# EAGLE board I-Rob_PCB (EAGLE 9.7.0)
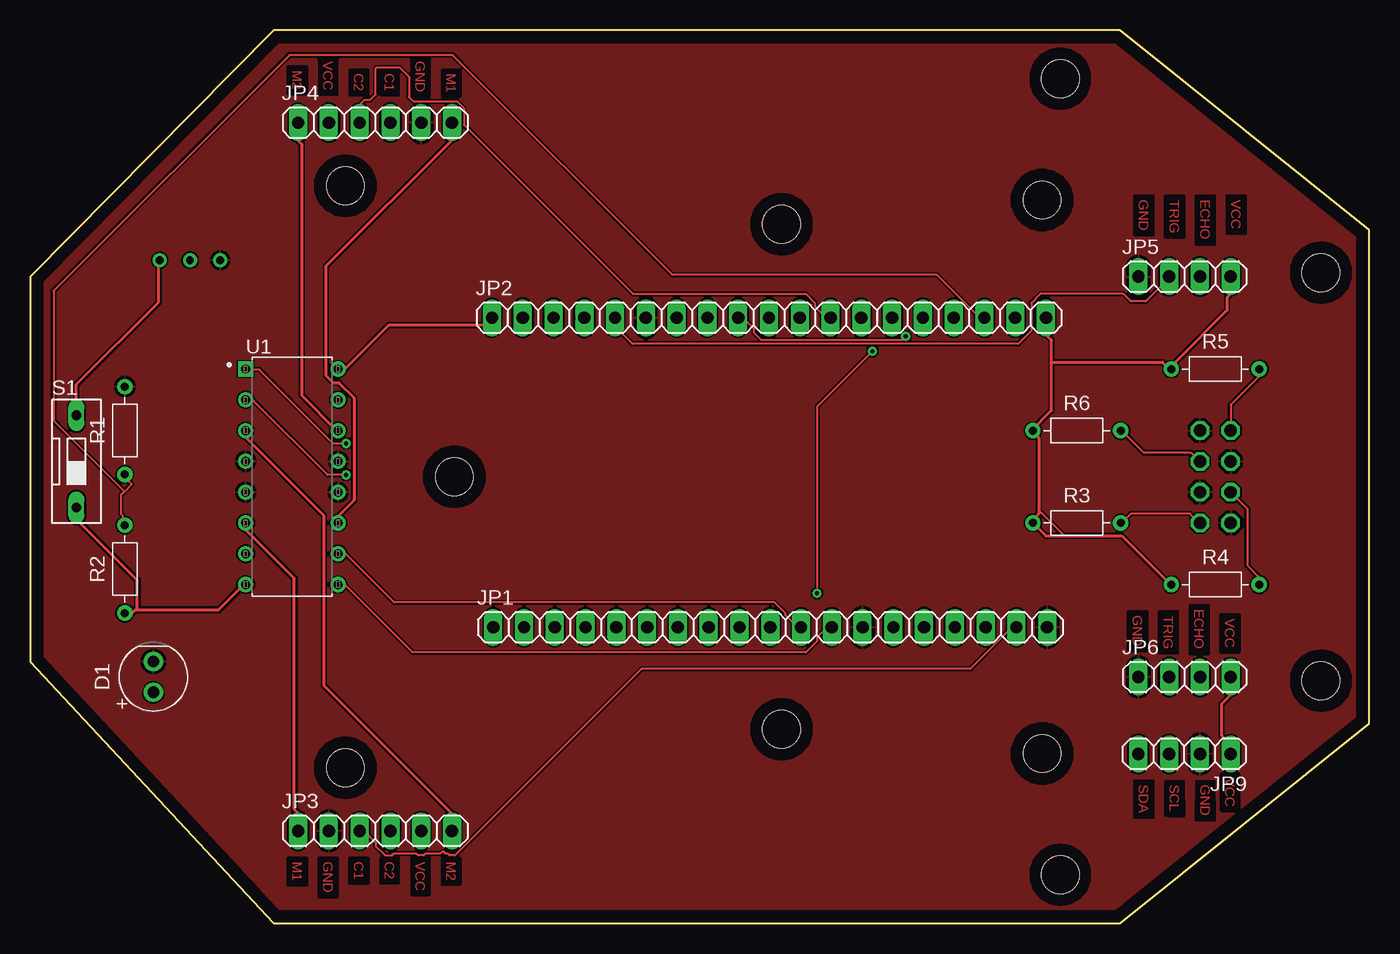
[diagram p0: board, top side]
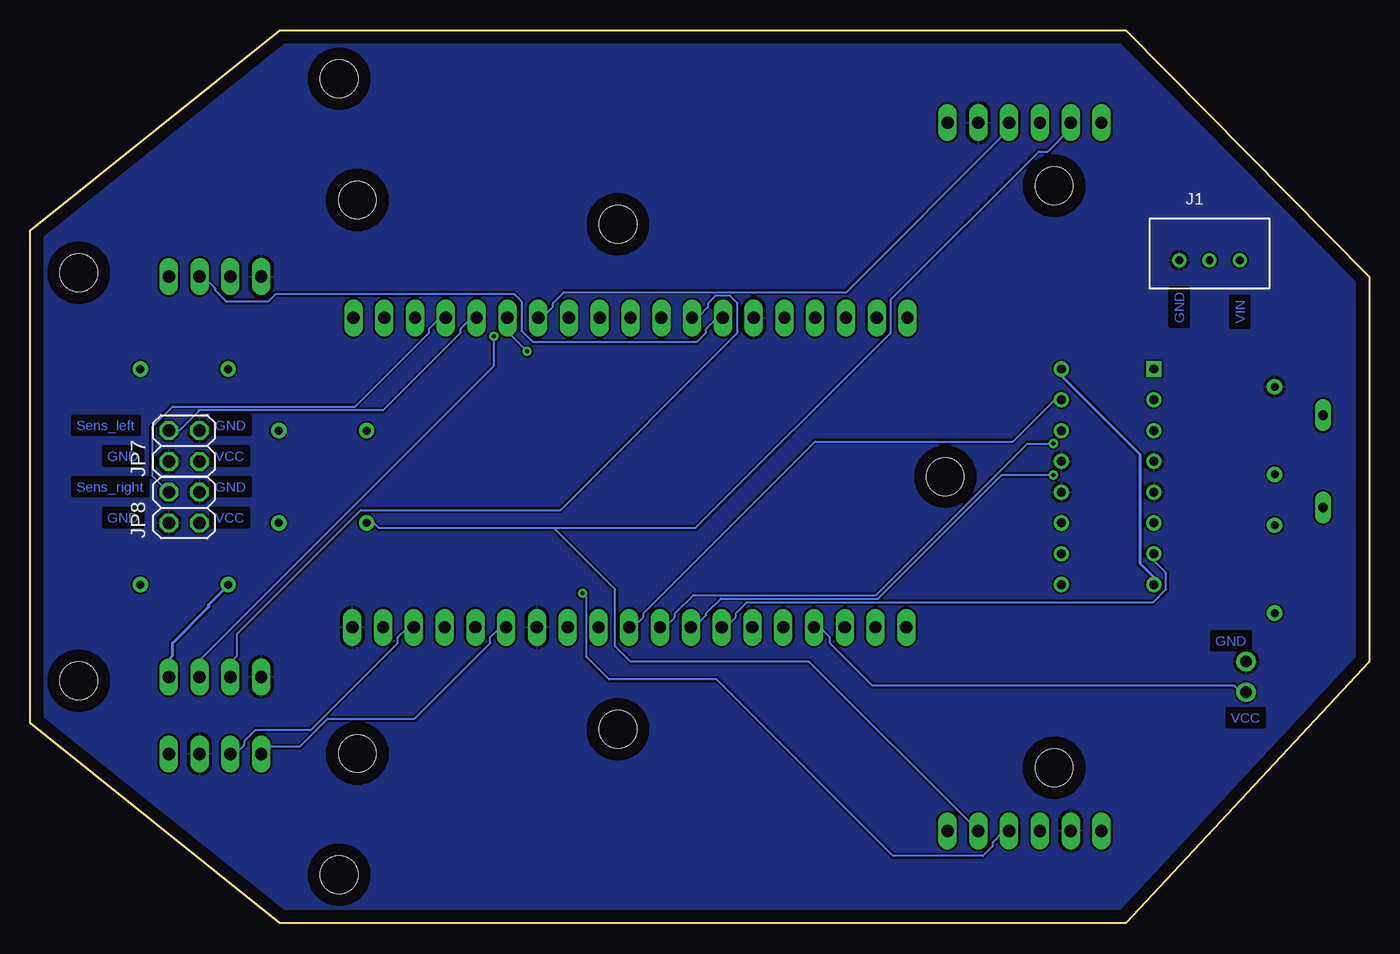
[diagram p1: board, bottom side, seen from below]

Size 110.49 x 73.66 mm. Coordinates in mm from the lower left corner, seen from the top.
Outline: 0,53.34 0,21.59 20.07,0 89.92,0 110.49,16.51 110.49,57.15 89.92,73.66 20.07,73.66 0,53.34
Copper layers (1*16): Top 0.035mm / dielectric 1.5mm / Bottom 0.035mm
Design rules "default": minimum track width 6mil, minimum drill 0.35mm, track to track 6mil, track to pad 6mil, pad to pad 6mil, via to via 6mil, smd to smd 6mil, copper to edge 40mil, drill to drill 6mil, minimum pad ring 10mil, minimum via ring 8mil, stop-mask expansion 4mil, vias tented up to drill 0mil, thermal gap 10mil
Holes 3.1 mm at 85,4 83.5,14 62,16 62,57.66 83.5,59.66 85,69.66 26,12.83 26,60.83 35,36.83 106.49,53.66 106.49,20

## Footprints (pad centres in the part's own frame; a part is rotated, then mirrored left to right if it is on the bottom)
LEDRD254W60D565H860B = drill 0.981 pad 1.581: 1 -1.27,0; 2 1.27,0
B3B-XH-A = drill 0.64: 1 0,0; 2 2.5,0; 3 5,0
1X19 = drill 1.016 long: 1 -22.86,0; 2 -20.32,0; 3 -17.78,0; 4 -15.24,0; 5 -12.7,0; 6 -10.16,0; 7 -7.62,0; 8 -5.08,0; 9 -2.54,0; 10 0,0; 11 2.54,0; 12 5.08,0; 13 7.62,0; 14 10.16,0; 15 12.7,0; 16 15.24,0; 17 17.78,0; 18 20.32,0; 19 22.86,0
1X06 = drill 1.016 long: 1 -6.35,0; 2 -3.81,0; 3 -1.27,0; 4 1.27,0; 5 3.81,0; 6 6.35,0
1X04 = drill 1.016 long: 1 -3.81,0; 2 -1.27,0; 3 1.27,0; 4 3.81,0
2X02 = drill 1.016 octagon: 1 -1.27,-1.27; 2 -1.27,1.27; 3 1.27,-1.27; 4 1.27,1.27
RESAD724W46L381D178B = drill 0.66 pad 1.26: 1 -3.62,0; 2 3.62,0
DS-01 = drill 0.813 long: 1 0,-3.81; 2 0,3.81
DIP-16_300MIL = drill 0.74 pad 1.14 square: 1 -3.81,8.89 | drill 0.74 pad 1.14: 2 -3.81,6.35; 3 -3.81,3.81; 4 -3.81,1.27; 5 -3.81,-1.27; 6 -3.81,-3.81; 7 -3.81,-6.35; 8 -3.81,-8.89; 9 3.81,-8.89; 10 3.81,-6.35; 11 3.81,-3.81; 12 3.81,-1.27; 13 3.81,1.27; 14 3.81,3.81; 15 3.81,6.35; 16 3.81,8.89

## Placement (x,y rotation side)
D1  LED_RED  [LEDRD254W60D565H860B]  10.16,20.32 90 top
J1  7.4V  [B3B-XH-A]  15.68,54.7 0 bottom
JP1  [1X19]  61.06,24.41 0 top
JP2  [1X19]  60.96,49.95 0 top
JP3  Motor_1  [1X06]  28.45,7.62 0 top
JP4  Motor_2  [1X06]  28.45,66.04 0 top
JP5  Ultraschall_2  [1X04]  95.25,53.34 0 top
JP6  Ultraschall_1  [1X04]  95.25,20.32 0 top
JP7  Liniensensor_2  [2X02]  97.79,39.37 90 bottom
JP8  Liniensensor_1  [2X02]  97.79,34.29 90 bottom
JP9  I2C  [1X04]  95.25,13.97 180 top
R1  7,5k  [RESAD724W46L381D178B]  7.81,40.64 90 top
R2  30k  [RESAD724W46L381D178B]  7.81,29.21 90 top
R3  100  [RESAD724W46L381D178B]  86.36,33.02 0 top
R4  10k  [RESAD724W46L381D178B]  97.79,27.94 0 top
R5  10k  [RESAD724W46L381D178B]  97.79,45.72 0 top
R6  100  [RESAD724W46L381D178B]  86.36,40.64 0 top
S1  DS01  [DS-01]  3.81,38.1 0 top
U1  L293DNE  [DIP-16_300MIL]  21.59,36.83 0 top

## Library data of the parts
D1 = Opto-Electronic; CATEGORY: Opto-Electronic; SUB-CATEGORY: LED
J1 = Connector; CATEGORY: CONNECTOR; DESCRIPTION: 2.5mm pitch/disconnectable crimp style connector; MANUFACTURER: JST (XH connector); MPN: B3B-XH-A; PART_STATUS: ACTIVE; ROHS_COMPLIANT: COMPLIANT; SERIES: B3B-XH-A; SUB_CATEGORY: THROUGH HOLE CONNECTOR; TYPE: SIDE ENTRY
JP1 JP2 = pinhead
JP3-JP9 = Connector; CATEGORY: CONNECTOR; SUB-CATEGORY: PIN-HEADER
R1-R6 = Resistor; CATEGORY: Resistor; SUB-CATEGORY: Fixed
S1 = Switch; CATEGORY: SWITCH; TYPE: SPST
U1 = IC; CREATED_BY: PCBLayout.com; DIGI-KEY_PART: 296-9518-5-ND; MANUFACTURER: Texas Instruments; MPN: L293DNE; PACKAGE: DIP-16

## Nets
GND: D1.2 J1.1 JP1.13 JP1.19 JP2.6 JP3.2 JP4.5 JP5.1 JP6.1 JP7.2 JP7.3 JP8.2 JP8.3 JP9.2 R1.2 U1.4 U1.5 U1.12 U1.13
N$1: JP1.10 U1.15
N$2: JP1.11 U1.10
N$3: JP1.12 U1.9
N$4: JP1.9 U1.1
N$5: JP1.7 U1.7
N$6: JP1.8 U1.2
N$7: JP2.1 R2.1 S1.1 U1.8 U1.16
N$8: JP2.17 R1.1 R2.2
N$9: JP4.6 U1.11
N$10: JP4.1 U1.14
N$11: JP3.6 U1.3
N$12: JP3.1 U1.6
N$13: JP2.19 JP3.5 JP4.2 JP5.4 JP6.4 JP9.1 R3.1 R4.1 R5.1 R6.1
N$15: JP8.1 R3.2
N$16: JP2.5 JP5.2
N$17: JP7.1 R6.2
N$18: JP2.15 JP7.4 R5.2
N$19: JP2.16 JP8.4 R4.2
N$20: D1.1 JP1.4
N$21: JP2.7 JP5.3
N$22: JP2.8 JP6.2
N$23: JP2.12 JP4.3
N$24: JP2.9 JP6.3
N$27: JP2.13 JP4.4
N$28: JP2.14 JP3.4
N$29: JP1.18 JP3.3
N$30: JP1.17 JP9.3
N$31: JP1.14 JP9.4
VCC: J1.3 S1.2

## Tracks (layer width: path | path; a pad name or v marks a point on that pad's centre or on a via)
GND
  pour Top: 88.9,71.12 19.05,71.12 19.05,68.58 16.51,68.58 16.51,66.04 13.97,66.04 13.97,63.5 11.43,63.5 11.43,60.96 8.89,60.96 8.89,59.69 6.35,59.69 6.35,57.15 2.54,57.15 2.54,21.59 6.35,21.59 6.35,19.05 11.43,19.05 11.43,12.7 13.97,12.7 13.97,8.89 17.78,8.89 17.78,3.81 19.05,3.81 19.05,1.27 90.17,1.27 90.17,7.62 93.98,7.62 93.98,10.16 99.06,10.16 99.06,12.7 101.6,12.7 101.6,16.51 106.68,16.51 106.68,58.42 104.14,58.42 104.14,60.96 100.33,60.96 100.33,63.5 96.52,63.5 96.52,66.04 92.71,66.04 92.71,68.58 88.9,68.58
  pour Bottom: 20.32,73.66 0,53.34 0,21.59 20.32,0 90.17,0 110.49,16.51 110.49,57.15 90.17,73.66
  pour Top: -12.7,78.74 113.03,78.74 113.03,-7.62 -12.7,-7.62
  pour Bottom: -11.43,78.74 -11.43,-3.81 111.76,-3.81 111.76,78.74
N$1
  Bottom 0.152: U1.15 25.45,43.08 26.06,43.08 29.41,39.73 45.72,39.73 59.89,25.55 59.89,25.25 60.66,24.49 60.96,24.49 JP1.10
N$2
  Top 0.152: U1.10 25.45,30.43 26.06,30.43 30.02,26.47 61.42,26.47 62.33,25.55 62.33,25.4 63.25,24.49 63.55,24.49 JP1.11
N$3
  Top 0.152: U1.9 25.45,27.84 26.06,27.84 31.55,22.35 64.01,22.35 64.92,23.27 64.92,23.57 65.68,24.33 66.14,24.33 JP1.12
N$4  (via drill 0.35)
  Top 0.152: v26.06,39.57 24.99,39.57 18.9,45.67 17.83,45.67 U1.1
  Bottom 0.152: v26.06,39.57 28.19,39.57 40.69,27.08 55.78,27.08 57.3,25.55 57.3,25.25 58.06,24.49 58.52,24.49 JP1.9
N$5
  Bottom 0.152: U1.7 17.68,30.43 17.68,29.82 16.76,28.91 16.76,27.53 17.83,26.47 51.36,26.47 52.27,25.55 52.27,25.25 53.03,24.49 53.34,24.49 JP1.7
N$6  (via drill 0.35)
  Top 0.152: v26.06,36.98 24.54,36.98 18.44,43.08 17.83,43.08 U1.2
  Bottom 0.152: v26.06,36.98 30.33,36.98 40.54,26.77 53.49,26.77 54.71,25.55 54.71,25.4 55.63,24.49 55.93,24.49 JP1.8
N$7
  Top 0.152: 25.45,45.82 U1.16 | 38.1,49.94 JP2.1
  Top 0.254: 25.45,45.82 26.06,45.82 29.57,49.33 37.49,49.33 38.1,49.94 | 8.84,25.86 8.69,25.86 8.38,25.55 7.92,25.55 R2.1 | 8.84,25.86 15.54,25.86 17.53,27.84 17.68,27.84 U1.8 | S1.1 3.81,33.33 8.84,28.3 8.84,25.86
  Bottom 0.152: 17.83,27.99 U1.8
  Bottom 0.254: 17.83,27.99 17.83,28.6 18.9,29.67 18.9,38.66 25.3,45.06 25.3,45.67 U1.16
N$8
  Top 0.152: 7.77,35.61 8.38,36.22 7.92,36.68 7.92,36.98 R1.1 | 7.77,35.61 7.47,35.31 7.47,33.78 7.62,33.63 7.62,33.48 7.77,33.33 7.77,32.87 R2.2 | JP2.17 78.36,49.95 74.82,53.49 52.98,53.49 34.86,71.62 21.39,71.62 1.93,52.16 1.93,41.45 7.77,35.61
N$9
  Top 0.152: JP4.6 34.75,65.94
  Top 0.254: 34.75,65.94 34.75,64.57 24.38,54.2 24.38,45.21 24.99,44.6 25.45,44.6 26.72,43.34 26.72,34.9 26.67,34.85 25.45,33.63 25.45,33.02 U1.11
N$10
  Top 0.152: 25.3,40.64 U1.14
  Top 0.254: 25.3,40.64 22.4,43.54 22.4,64.26 22.1,64.57 JP4.1
N$11
  Top 0.254: U1.3 17.83,40.64 17.83,40.03 24.23,33.63 24.23,19.61 34.75,9.09 34.75,7.72 JP3.6
N$12
  Top 0.254: JP3.1 22.1,9.09 21.79,9.4 21.79,28.45 17.83,32.41 17.83,33.02 U1.6
N$13
  Top 0.152: 94.18,45.82 R5.1 | 82.75,33.02 R3.1 | 82.6,40.64 R6.1 | 83.21,34.09 85.34,31.95 | 94.03,27.99 R4.1
  Top 0.254: JP9.1 99.06,14.73 98.3,15.49 98.3,18.09 99.06,18.85 JP6.4 | 94.18,45.82 94.49,46.13 94.49,46.28 98.75,50.55 98.75,51.61 99.06,51.92 JP5.4 | 82.75,33.02 82.75,33.33 83.21,33.78 83.21,34.09 83.21,40.03 82.6,40.64 84.28,42.32 84.28,46.28 | JP2.19 83.82,48.56 84.28,48.11 84.28,46.28 | 84.28,46.28 93.42,46.28 93.88,45.82 94.03,45.82 R5.1 | 94.03,27.99 90.07,31.95 85.34,31.95 83.81,31.95 R3.1
  Bottom 0.152: 94.18,27.84 R4.1 | R3.1 82.14,33.02 81.74,32.61 67.31,32.61 | JP4.2 24.69,65.94 24.69,65.48 26.52,63.65 27.28,63.65 39.47,51.46 39.47,48.72 55.58,32.61 67.31,32.61 | JP3.5 46.23,21.59 60.96,21.59 62.23,22.86 62.23,27.53 67.31,32.61 | R5.1 93.98,45.72
  Bottom 0.254: 94.18,27.84 95.76,26.26 95.76,26.11 98.75,23.11 98.75,22.05 99.06,21.74 JP6.4
N$15
  Top 0.152: R3.2 90.07,33.02 90.83,33.78 95.71,33.78 96.47,33.02 JP8.1
N$16
  Top 0.152: JP2.5 48.31,49.94 48.31,49.17 49.68,47.8 81.53,47.8 82.6,48.87 82.6,51.16 83.36,51.92 90.22,51.92 90.83,51.31 92.05,51.31 94.03,53.29 JP5.2
N$17
  Top 0.152: R6.2 90.07,40.64 91.9,38.81 95.25,38.81 95.71,38.81 95.81,38.81 JP7.1
N$18
  Top 0.152: R5.2 101.35,45.67 101.35,45.06 99.06,42.77 JP7.4
  Bottom 0.152: 96.52,42.32 81.38,42.32 74.98,48.72 74.98,49.02 74.07,49.94 73.76,49.94 JP2.15 | 96.52,42.32 96.62,42.32 | 96.52,42.32 98.2,40.64 JP7.4
N$19
  Top 0.152: R4.2 101.35,27.99 101.35,28.6 100.43,29.52 100.43,34.19 JP8.4
  Bottom 0.152: JP2.16 76.2,49.94 76.66,49.94 77.57,49.02 77.57,48.72 83.67,42.62 98.75,42.62 100.43,40.95 100.43,36.93 JP8.4
N$20
  Bottom 0.152: JP1.4 45.72,24.33 45.26,24.33 44.5,23.57 44.5,23.11 41,19.61 11.12,19.61 10.67,19.15 10.21,19.15 D1.1
N$21
  Bottom 0.152: JP2.7 53.34,49.94 53.8,49.94 54.71,49.02 54.71,48.72 55.47,47.95 69.04,47.95 69.95,48.87 69.95,51.31 70.56,51.92 90.22,51.92 90.83,51.31 94.34,51.31 95.25,52.22 95.25,52.38 96.16,53.29 96.47,53.29 JP5.3
N$22
  Bottom 0.152: JP2.8 55.78,50.09 55.32,50.09 54.56,50.85 54.56,51.16 53.95,51.77 52.73,51.77 52.12,51.16 52.12,48.72 66.75,34.09 83.21,34.09 93.42,23.88 93.42,22.05 93.88,21.59 93.88,20.37 JP6.2
N$23
  Top 0.152: JP4.3 27.28,66.09 27.28,67.61 27.58,67.92 28.04,67.92 28.5,68.38 28.5,70.51 28.59,70.6 30.48,70.6 31.25,69.83 31.25,68.15 31.61,67.79 35.21,67.79 35.79,67.21 35.79,65.86 49.73,51.92 64.01,51.92 64.77,51.16 64.77,50.85 65.53,50.09 65.99,50.09 JP2.12
N$24  (via drill 0.35)
  Top 0.152: v72.24,48.41 71.93,48.11 60.35,48.11 59.74,48.72 59.74,49.02 58.83,49.94 58.52,49.94 JP2.9
  Bottom 0.152: v72.24,48.41 72.24,45.97 96.47,21.74 96.47,20.37 JP6.3
N$27
  Bottom 0.152: JP4.4 29.72,65.48 43.13,52.07 66.45,52.07 67.36,51.16 67.36,50.85 68.12,50.09 68.58,50.09 JP2.13
N$28  (via drill 0.35)
  Top 0.152: v64.92,27.23 64.92,42.62 v69.49,47.19
  Bottom 0.152: v69.49,47.19 71.02,48.72 71.02,49.94 JP2.14 | JP3.4 29.72,7.57 30.18,7.57 31.09,6.65 31.09,6.35 31.88,5.56 39.29,5.56 53.85,20.12 62.74,20.12 64.59,21.97 64.59,26.9 v64.92,27.23
N$29
  Top 0.152: JP3.3 27.28,7.57 27.58,7.57 28.5,6.65 28.5,6.35 29.26,5.59 29.87,5.59 30.02,5.74 31.85,5.74 32,5.59 32.46,5.59 32.61,5.74 33.83,5.74 33.98,5.89 34.14,5.89 34.29,5.74 34.44,5.74 34.59,5.59 35.05,5.59 50.44,20.98 77.57,20.98 80.92,24.33 81.38,24.33 JP1.18
N$30
  Bottom 0.152: JP9.3 93.57,13.97 92.81,14.73 92.81,15.04 91.9,15.95 87.33,15.95 80.16,23.11 80.16,23.57 79.4,24.33 78.94,24.33 JP1.17
N$31
  Bottom 0.152: JP9.4 90.83,14.58 88.24,14.58 85.95,16.87 78.79,16.87 72.54,23.11 72.54,23.57 71.78,24.33 71.32,24.33 JP1.14
VCC
  Top 0.254: S1.2 3.81,44.45 10.59,51.23 10.59,54.61 J1.3

## Text on the board
Top: VCC | GND | M2 | C2 | C1 | M1 | GND | TRIG | ECHO | VCC | ECHO | GND | TRIG | VCC | VCC | SDA | SCL | GND | M1 | GND | C1 | C2 | VCC | M2
Bottom: VIN | GND | GND | Sens_left | VCC | GND | GND | Sens_right | VCC | GND | GND | VCC